# Altium PCB Power.PcbDoc
Units mil, origin at the board's own origin, x right, y up, seen from the top; angles counter-clockwise.
Board outline 6000 x 4000 mil, 2 copper layers (Top Layer, Bottom Layer); 28 components, 14 nets, 129 pads, 0 vias.
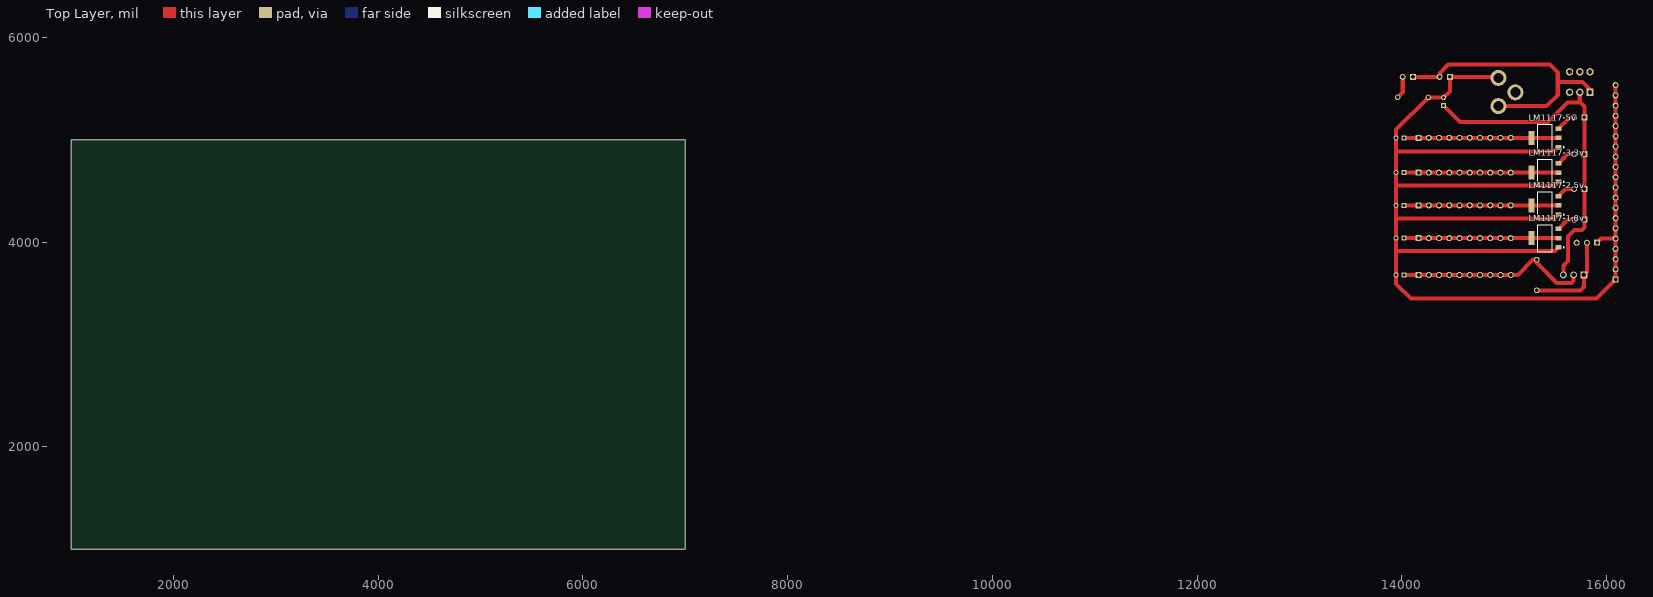
[diagram p0: Top Layer view]
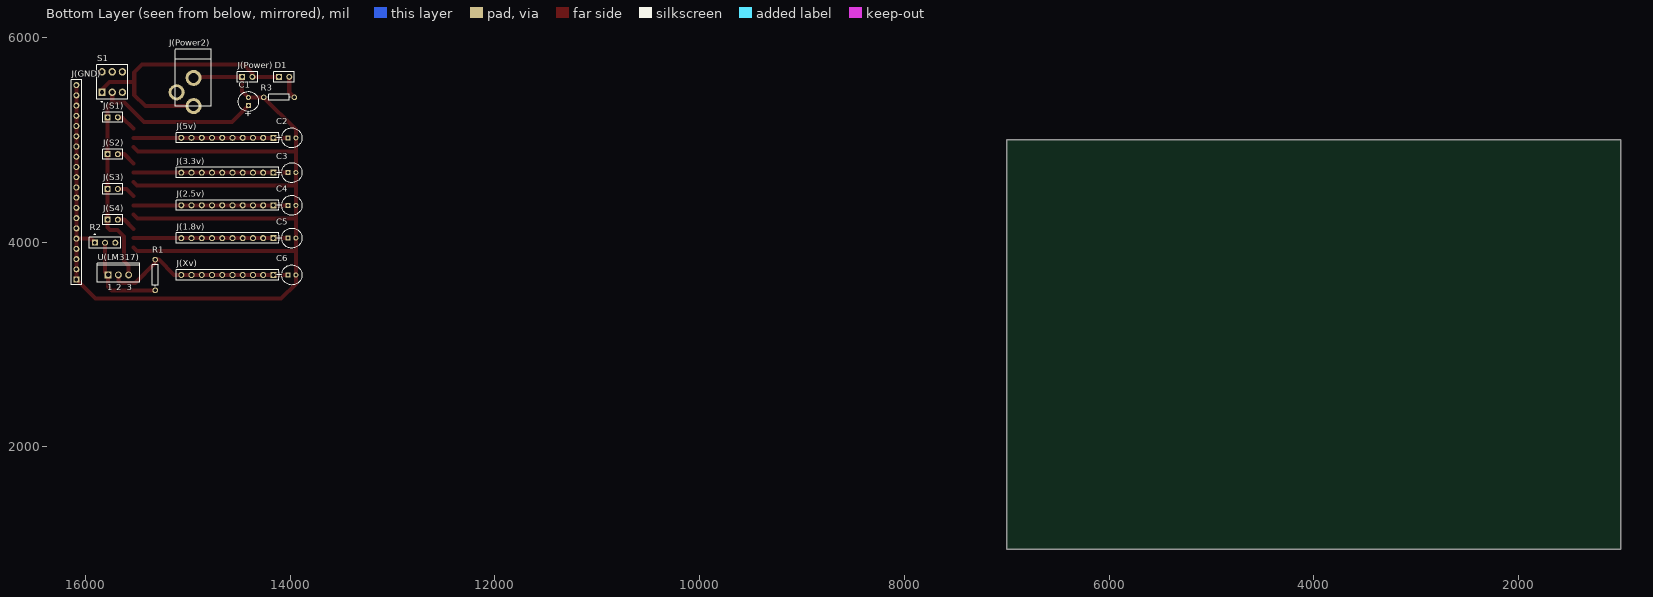
[diagram p1: Bottom Layer view, seen from below]

## Layer stack, top to bottom
Top Layer: signal copper 1.4
Dielectric: dielectric 12.6, FR-4, Dk 4.8
Bottom Layer: signal copper 1.4

## Board outline
1000,1000 7000,1000 7000,5000 1000,5000

## Design rules (kind name [scope] priority, off if disabled: settings)
Clearance [All] p1: gap=10
ComponentClearance [All] p1: gap=10 collisioncheckmode=0
PolygonConnect [All] p1: connectstyle=Relief reliefconductorwidth=10 reliefentries=4 polygonreliefangle="90 Angle"
RoomDefinition Power [InComponentClass('Power')] p1: confinementstyle=ConfineIn formatcopy=TRUE outline 0,0 2000,0 2000,1000 0,1000
RoutingLayers [All] p1: top layer=Horizontal bottom layer=Vertical
RoutingVias [All] p1: holewidth=28 width=50 viastyle="Through Hole" minholewidth=28 minwidth=50 maxholewidth=28 maxwidth=50
SolderMaskExpansion [All] p1: expansion=4
TestPointUsage [All] p1: valid=0 allowmultiple=FALSE
Testpoint [All] p1: side=15 testpointundercomponent=TRUE minsize=40 maxsize=100 preferedsize=60 minholesize=0 maxholesize=40 preferedholesize=32 testpointgrid=1 style=1023 order=1234567890
Width [All] p1: maxlimit=10 minlimit=10 preferedwidth=10
16 further rules are at their usual default settings.

## Components (designator, comment, footprint, x,y, rotation, side; value= is the part's Value field where it differs from the comment)
C1 "Cap Pol1" CAPPR2-5X6.8 14410,5375 r90 bottom
C2 "Cap Pol1" CAPPR2-5X6.8 13985,5020 r180 bottom
C3 "Cap Pol1" CAPPR2-5X6.8 13985,4680 r180 bottom
C4 "Cap Pol1" CAPPR2-5X6.8 13985,4360 r180 bottom
C5 "Cap Pol1" CAPPR2-5X6.8 13985,4040 r180 bottom
C6 "Cap Pol1" CAPPR2-5X6.8 13985,3680 r180 bottom
D1 "LED0" HDR1X2 14110,5615 r180 bottom
J(1.8v) "Header 10" HDR1X10 14165,4040 r0 bottom
J(2.5v) "Header 10" HDR1X10 14165,4360 r0 bottom
J(3.3v) "Header 10" HDR1X10 14165,4680 r0 bottom
J(5v) "Header 10" HDR1X10 14165,5020 r0 bottom
J(GND) "Header 20" HDR1X20 16090,3635 r90 bottom
J(Power2) "Header 2" Power -34540,55005 r180 bottom
J(Power) "Header 2" HDR1X2 14470,5615 r180 bottom
J(S1) "Header 2" HDR1X2 15785,5220 r180 bottom
J(S2) "Header 2" HDR1X2 15785,4860 r180 bottom
J(S3) "Header 2" HDR1X2 15785,4520 r180 bottom
J(S4) "Header 2" HDR1X2 15785,4220 r180 bottom
J(Xv) "Header 10" HDR1X10 14165,3680 r0 bottom
LM1117-1.8v "REG1117-5" ZZ311 15400,4040 r90 top
LM1117-2.5v "REG1117-5" ZZ311 15400,4360 r90 top
LM1117-3.3v "REG1117-5" ZZ311 15400,4680 r90 top
LM1117-5v "REG1117-5" ZZ311 15400,5020 r90 top
R1 "Res1" AXIAL-0.3 15320,3680 r90 bottom
R2 "Res Adj1" PIN3 15910,3995 r180 bottom
R3 "Res1" AXIAL-0.3 14110,5415 r0 bottom
S1 "SW-DPDT" DPDT-6 15740,5565 r90 bottom
U(LM317) "LM317T" TO-220 15680,3680 r180 bottom

## Footprints (in the part's own frame and the unit in brackets; to place one, negate y for a bottom-side part, rotate by r counter-clockwise, add the part's x,y. Pads: shape width x height; smd on the part's side, far side on the other; paste and mask are expansions set on the pad)
AXIAL-0.3 [mm]
  round 1.4 hole 0.85: 1(-3.81,0) 2(3.81,0)
  silkscreen extent -2.77,-0.76 2.77,0.76
CAPPR2-5X6.8 [mm]
  rect 1.25x1.25 hole 0.75: 1(-1,0)
  round 1.25 hole 0.75: 2(1,0)
  silkscreen extent -2.5,-2.5 2.5,2.5
DPDT-6 [mm]
  rect 1.85x1.85 hole 1.1: 1(-2.54,2.54)
  round 1.85 hole 1.1: 2(-2.54,0) 3(-2.54,-2.54) 4(2.54,-2.54) 5(2.54,0) 6(2.54,2.54)
  silkscreen extent -4.96,-3.81 4.28,3.81
HDR1X2 [mm] "Connector; Header; 2 Position"
  rect 1.5x1.5 hole 0.9: 1(0,0)
  round 1.5 hole 0.9: 2(2.54,0)
  silkscreen extent -1.27,-1.27 3.81,1.27
HDR1X10 [mm] "Connector; Header; 10 Position"
  rect 1.5x1.5 hole 0.9: 1(0,0)
  round 1.5 hole 0.9: 2(2.54,0) 3(5.08,0) 4(7.62,0) 5(10.16,0) 6(12.7,0) 7(15.24,0) 8(17.78,0) 9(20.32,0) 10(22.86,0)
  silkscreen extent -1.27,-1.27 24.13,1.27
HDR1X20 [mm] "Connector; Header; 20 Position"
  rect 1.5x1.5 hole 0.9: 1(0,0)
  round 1.5 hole 0.9: 2(2.54,0) 3(5.08,0) 4(7.62,0) 5(10.16,0) 6(12.7,0) 7(15.24,0) 8(17.78,0) 9(20.32,0) 10(22.86,0) 11(25.4,0) 12(27.94,0) 13(30.48,0) 14(33.02,0) 15(35.56,0) 16(38.1,0) 17(40.64,0) 18(43.18,0) 19(45.72,0) 20(48.26,0)
  silkscreen extent -1.27,-1.27 49.53,1.27
PIN3 [mm] "Connector; 2-Conductor Jack, 1 break contact"
  rect 1.5x1.5 hole 0.9: 1(0,0)
  oval 1.51x1.5 hole 0.9: 2(2.54,0)
  round 1.5 hole 0.9: 3(5.08,0)
  silkscreen extent -1.4,-1.4 6.48,2.17
Power [mm]
  round 4 hole 2.5: 0(-1261.11,-1258.316) 1(-1256.919,-1254.745) 2(-1256.919,-1261.745)
  silkscreen extent -1261.49,-1261.74 -1252.47,-1247.65
TO-220 [mm] "TO, Thru-Hole, Vertical, Heatsink Mounted; 3 In-Line Leads; Pitch 2.54 mm"
  rect 1.7x1.7 hole 1.1: 1(-2.54,0)
  round 1.7 hole 1.1: 2(0,0) 3(2.54,0)
  silkscreen extent -5.3,-1.85 5.3,2.85
ZZ311 [mm] "SOT-223/SC-73; 4 Leads; Body 6.7 x 7.3 mm, inc. leads (LxW max)"
  rect 1.1x1.55 smd: 1(-2.3,-3.375) 2(0,-3.375) 3(2.3,-3.375)
  rect 3.45x1.55 smd: 4(0,3.375)
  silkscreen extent -3.35,-4.83 3.35,1.85

## Part data
C1 C2 C3 C4 C5 C6: "Polarized Capacitor (Radial)"
D1: "Typical INFRARED GaAs LED"
J(1.8v) J(2.5v) J(3.3v) J(5v) J(Xv): "Header, 10-Pin"
J(GND): "Header, 20-Pin"
J(Power2) J(Power) J(S1) J(S2) J(S3) J(S4): "Header, 2-Pin"
LM1117-1.8v LM1117-2.5v LM1117-3.3v LM1117-5v: "800mA and 1A Low Dropout Positive Regulator 2.85V, 3.3V, 5V, and Adjustable"
R1 R3: "Resistor"
R2: "Variable Resistor"
S1: "Double-Pole, Double-Throw Switch"
U(LM317): "Three-Terminal Adjustable Output Positive Voltage Regulator"

## Nets (pads, with @x,y where several pads share a name; then routed paths per layer and width w, separated by ;. In a path a pad name is that pad's centre, name@x,y a point inside that pad or via, vN(x,y) a via of type N, cw(c..) or ccw(c..) an arc to the next point about the centre after c; other vN are vias at no path point)
GND: C1.2 C2.2 C3.2 C4.2 C5.2 C6.2 J(GND).1 J(GND).2 J(GND).3 J(GND).4 J(GND).5 J(GND).6 J(GND).7 J(GND).8 J(GND).9 J(GND).10 J(GND).11 J(GND).12 J(GND).13 J(GND).14 J(GND).15 J(GND).16 J(GND).17 J(GND).18 J(GND).19 J(GND).20 J(Power2).1 J(Power).1 LM1117-1.8v.1 LM1117-2.5v.1 LM1117-3.3v.1 LM1117-5v.1 R2.1 R3.2 | length 13597.5
  Top Layer w20: C2.2@13945,5020.63 C2.2 ; R3.2 R3.2@14260.63,5414.37 ; LM1117-1.8v.1@15532.32,3950 LM1117-1.8v.1 ; LM1117-2.5v.1@15532.32,4270 LM1117-2.5v.1 ; LM1117-3.3v.1@15532.32,4590 LM1117-3.3v.1 ; LM1117-5v.1@15532.32,4930 LM1117-5v.1
  Top Layer w40: C2.2@13945,5020.63 13945,5100 R3.2 ; 13945.63,3915 15498.42,3915 LM1117-1.8v.1 ; 13945.63,4230 15493.42,4230 LM1117-2.5v.1 ; 13945.63,4555 15498.42,4555 LM1117-3.3v.1 ; 13945.63,4885 15488.42,4885 LM1117-5v.1 ; C2.2 13945.63,3649.37 13945,3590 14090,3450 15905,3450 16090,3635 16090,5535 ; R3.2@14260.63,5414.37 C1.2 14470,5474.37 14470,5615 14945,5615 ; R2.1 15950,4035 16090,4035
  Bottom Layer w20: C1.2@14409.37,5415 C1.2
NetC1_1: C1.1 J(S1).1 J(S2).1 J(S3).1 J(S4).1 S1.2 U(LM317).3 | length 3428.5
  Top Layer w20: 15430,5175 15445,5180
  Top Layer w40: C1.1 14570.63,5175 15430,5175 15620,5365 15745,5365 15785,5325 15785,5220 ; 15580,3680 15580,3770 15625,3815 15625,4055 15690,4120 15760,4120 15785,4145 15785,4215 15785,5230 ; 15740,5365 S1.2@15740,5460
NetC2_1: C2.1 J(5v).1 J(5v).2 J(5v).3 J(5v).4 J(5v).5 J(5v).6 J(5v).7 J(5v).8 J(5v).9 J(5v).10 LM1117-5v.2 LM1117-5v.4 | length 1508.5
  Top Layer w40: C2.1 LM1117-5v.2
NetC3_1: C3.1 J(3.3v).1 J(3.3v).2 J(3.3v).3 J(3.3v).4 J(3.3v).5 J(3.3v).6 J(3.3v).7 J(3.3v).8 J(3.3v).9 J(3.3v).10 LM1117-3.3v.2 LM1117-3.3v.4 | length 1508.5
  Top Layer w40: C3.1 LM1117-3.3v.2
NetC4_1: C4.1 J(2.5v).1 J(2.5v).2 J(2.5v).3 J(2.5v).4 J(2.5v).5 J(2.5v).6 J(2.5v).7 J(2.5v).8 J(2.5v).9 J(2.5v).10 LM1117-2.5v.2 LM1117-2.5v.4 | length 1508.5
  Top Layer w40: C4.1 LM1117-2.5v.2
NetC5_1: C5.1 J(1.8v).1 J(1.8v).2 J(1.8v).3 J(1.8v).4 J(1.8v).5 J(1.8v).6 J(1.8v).7 J(1.8v).8 J(1.8v).9 J(1.8v).10 LM1117-1.8v.2 LM1117-1.8v.4 | length 1508.5
  Top Layer w40: C5.1 LM1117-1.8v.2
NetC6_1: C6.1 J(Xv).1 J(Xv).2 J(Xv).3 J(Xv).4 J(Xv).5 J(Xv).6 J(Xv).7 J(Xv).8 J(Xv).9 J(Xv).10 R1.2 U(LM317).2 | length 1901.8
  Top Layer w40: C6.1 15065,3680 15135,3680 15285,3830 R1.2 15320,3795 15515,3600 15660,3600 15680,3620 15680,3680
NetD1_2: D1.2 R3.1 | length 220.7
  Top Layer w40: R3.1 14010,5465 D1.2
NetJ(S1)_2: J(S1).2 LM1117-5v.3 | length 197.5
  Top Layer w40: LM1117-5v.3 15642.32,5220 15685,5220
NetJ(S2)_2: J(S2).2 LM1117-3.3v.3 | length 189.2
  Top Layer w40: LM1117-3.3v.3 15622.32,4860 15685,4860
NetJ(S3)_2: J(S3).2 LM1117-2.5v.3 | length 180.9
  Top Layer w40: LM1117-2.5v.3 15602.32,4520 15685,4520
NetJ(S4)_2: J(S4).2 LM1117-1.8v.3 | length 189.2
  Top Layer w40: LM1117-1.8v.3 15622.32,4220 15685,4220
NetR1_1: R1.1 R2.2 U(LM317).1 | length 916.9
  Top Layer w40: R1.1 15670,3530 15745,3530 15780,3565 15780,3640 15780,3680 15810,3710 R2.2
VCC: D1.1 J(Power2).2 J(Power).2 S1.1 | length 2717.9
  Top Layer w40: D1.1 14370,5615 14370,5650 14455,5735 15450,5735 15525,5660 15525,5440 15415,5330 14965,5330 ; 15525,5565 15765,5565 15840,5490 S1.1@15840,5460
pads on no net: J(Power2).0 R2.3 S1.3 S1.4 S1.5 S1.6

## Text inside footprints (layer, text, board x,y; h text height)
C1: Bottom Overlay "+" at 14380.47,5218.5 h59.06 r270
C2: Bottom Overlay "+" at 14141.5,4990.47 h59.06
C3: Bottom Overlay "+" at 14141.5,4650.47 h59.06
C4: Bottom Overlay "+" at 14141.5,4330.47 h59.06
C5: Bottom Overlay "+" at 14141.5,4010.47 h59.06
C6: Bottom Overlay "+" at 14141.5,3650.47 h59.06
U(LM317): Bottom Overlay "3" at 15599.68,3529.41 h59.06; Bottom Overlay "2" at 15699.68,3529.41 h59.06; Bottom Overlay "1" at 15789.84,3529.41 h59.06